# Altium PCB shield_MRF24J40MA.PcbDoc
Units mil, origin at the board's own origin, x right, y up, seen from the top; angles counter-clockwise.
Board outline 1590 x 2520 mil, 2 copper layers (Top Layer, Bottom Layer); 5 components, 20 nets, 46 pads, 0 vias.
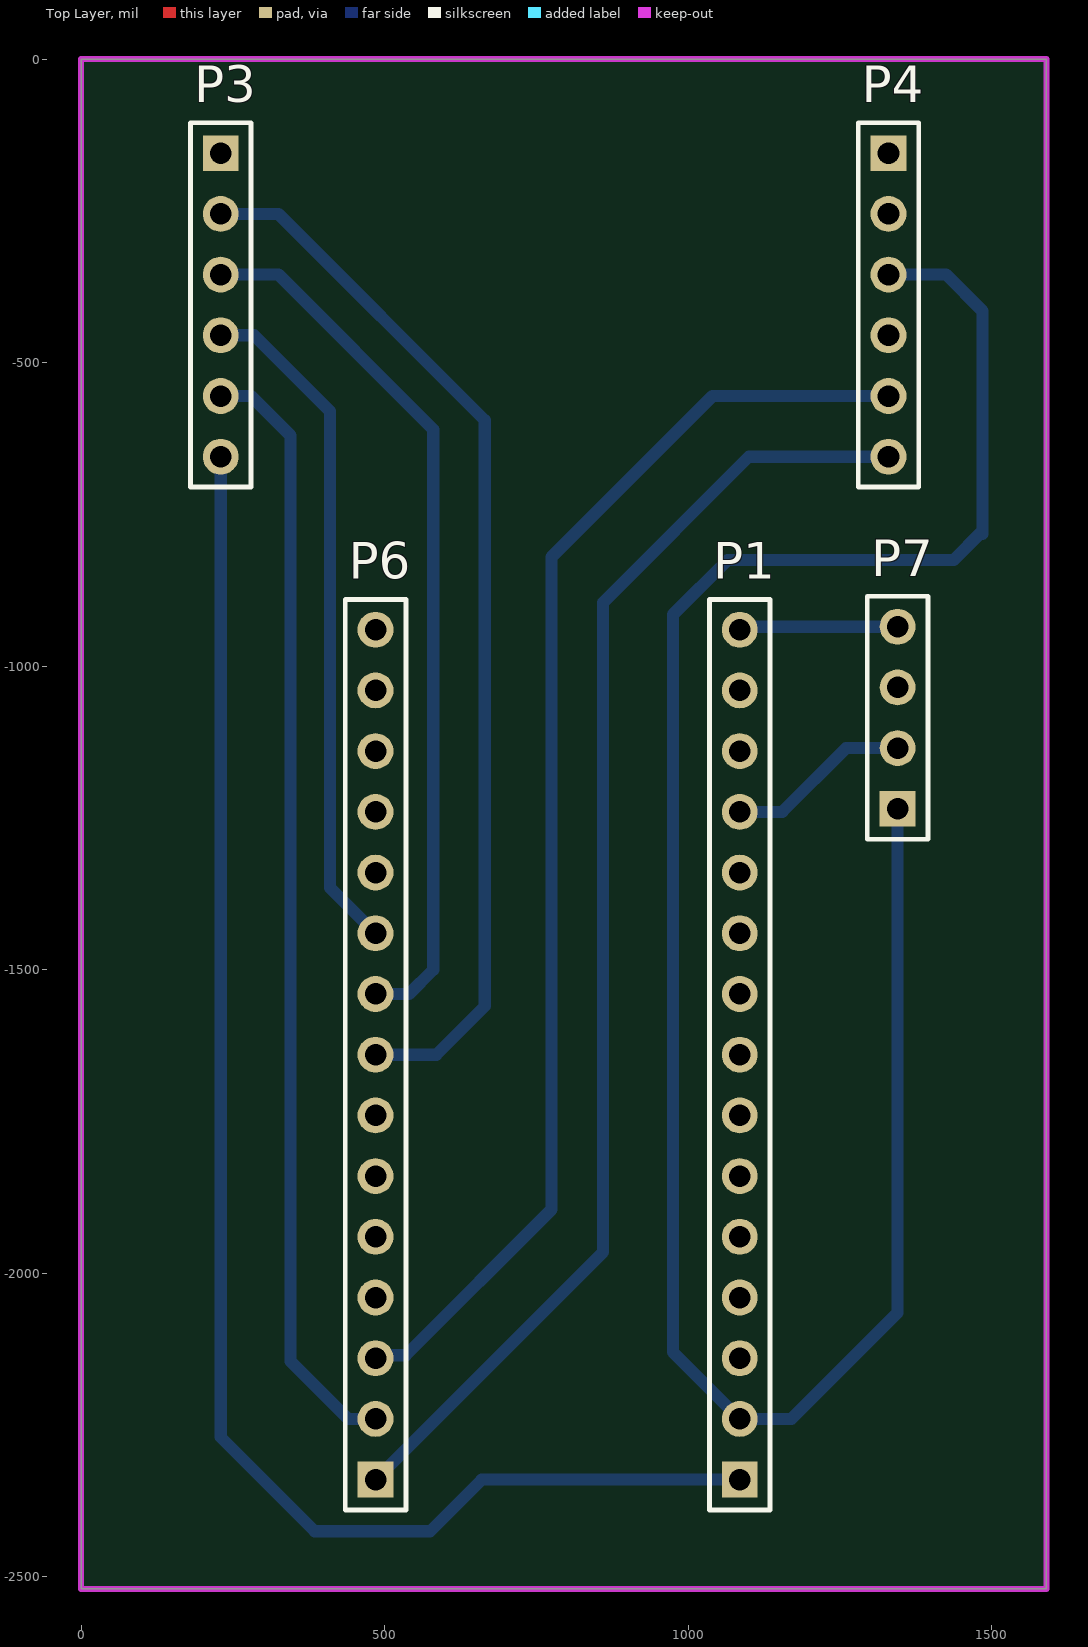
[diagram p0: Top Layer view]
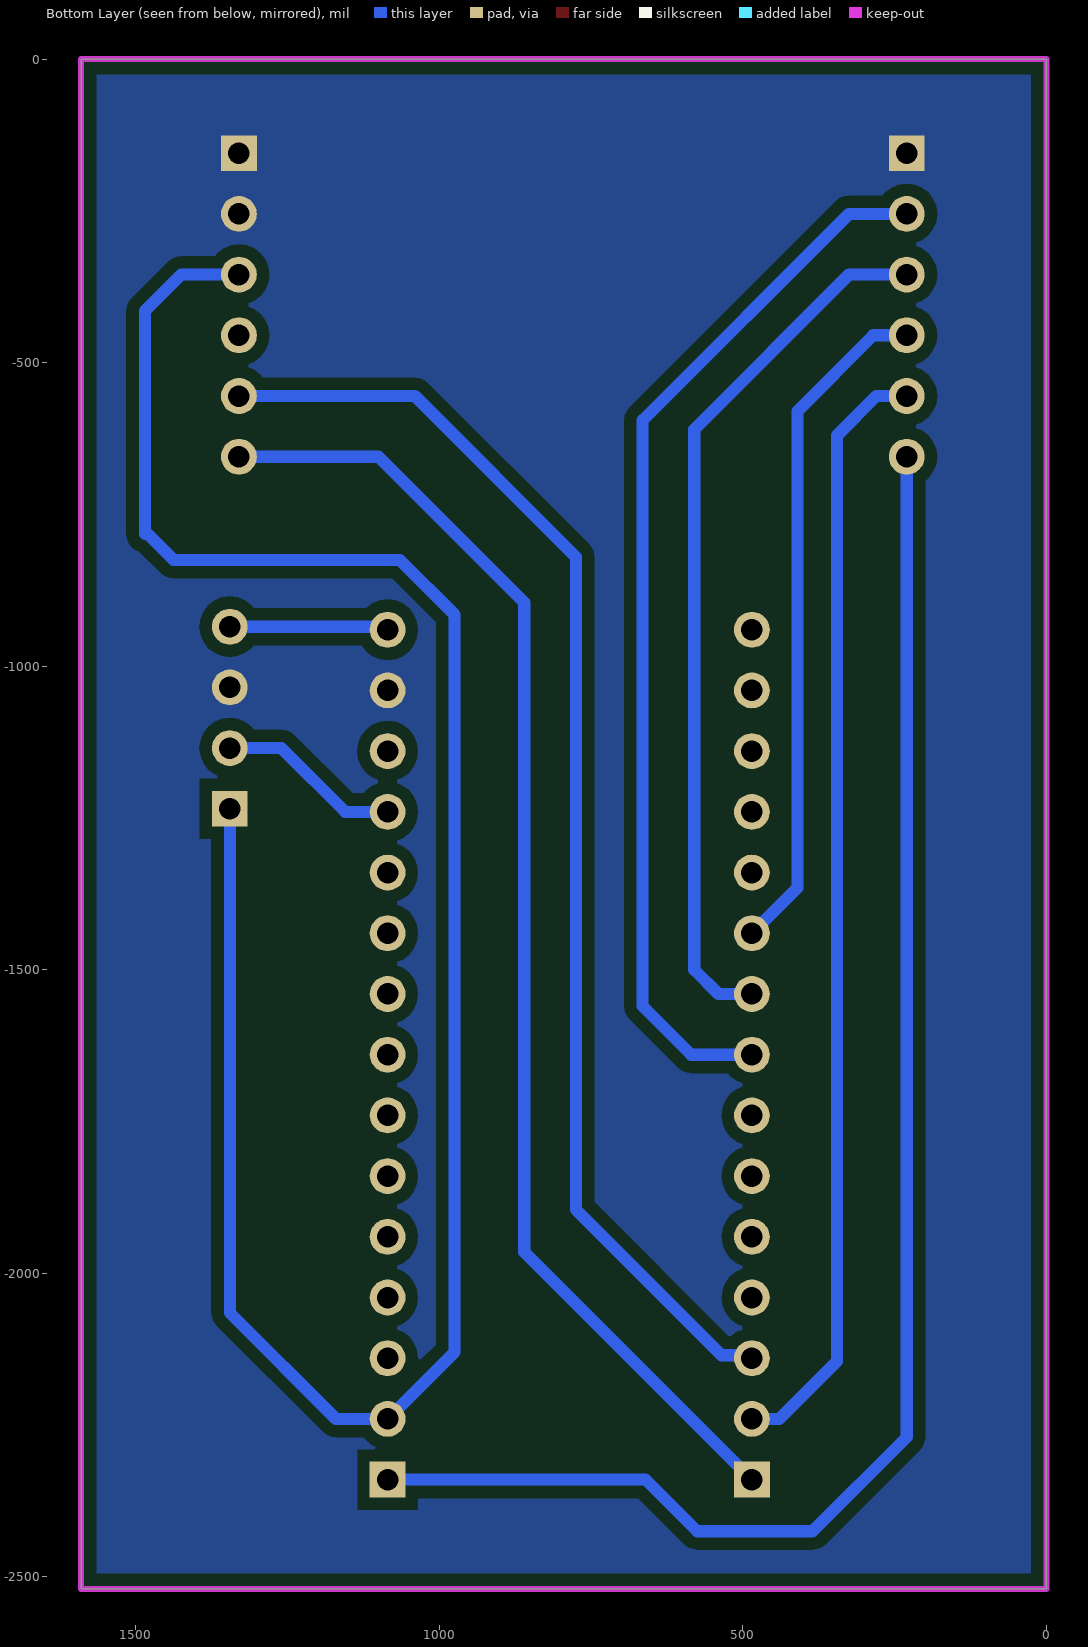
[diagram p1: Bottom Layer view, seen from below]

## Layer stack, top to bottom
Top Solder: solder mask 0.4, Solder Resist, Dk 3.5
Top Layer: signal copper 1.4
Dielectric 1: dielectric 12.6, FR-4, Dk 4.8
Bottom Layer: signal copper 1.4
Bottom Solder: solder mask 0.4, Solder Resist, Dk 3.5

## Board outline
0,0 1590,0 1590,-2520 0,-2520

## Design rules (kind name [scope] priority, off if disabled: settings)
Clearance [All] p1: gap=20 ignorepadtopadclearanceinfootprint=FALSE
PolygonConnect [All] p1: connectstyle=Direct reliefconductorwidth=10 reliefentries=4 polygonreliefangle="90 Angle" airgapwidth=10
RoutingVias [All] p1: holewidth=28 width=50 viastyle="Through Hole" minholewidth=28 minwidth=50 maxholewidth=28 maxwidth=50
SolderMaskExpansion [All] p1: expansion=4 istentingtop=FALSE
Width [All] p1: maxlimit=50 minlimit=10 preferedwidth=20 minimp=50.000000 maximp=50.000000 favimp=50.000000
30 further rules are at their usual default settings.

## Components (designator, comment, footprint, x,y, rotation, side; value= is the part's Value field where it differs from the comment)
P1 "Header 15" HDR1X15 1085,-2340 r90 top
P3 "Header 6" HDR1X6 230,-155 r270 top
P4 "Header 6" HDR1X6 1330,-155 r270 top
P6 "Header 15" HDR1X15 485,-2340 r90 top
P7 "Header 4" HDR1X4 1345,-1235 r90 top

## Footprints (in the part's own frame and the unit in brackets; to place one, negate y for a bottom-side part, rotate by r counter-clockwise, add the part's x,y. Pads: shape width x height; smd on the part's side, far side on the other; paste and mask are expansions set on the pad)
HDR1X4 [mm] "Connector; Header; 4 Position"
  rect 1.5x1.5 hole 0.9: 1(0,0)
  round 1.5 hole 0.9: 2(2.54,0) 3(5.08,0) 4(7.62,0)
  silkscreen extent -1.27,-1.27 8.89,1.27
HDR1X6 [mm] "Connector; Header; 6 Position"
  rect 1.5x1.5 hole 0.9: 1(0,0)
  round 1.5 hole 0.9: 2(2.54,0) 3(5.08,0) 4(7.62,0) 5(10.16,0) 6(12.7,0)
  silkscreen extent -1.27,-1.27 13.97,1.27
HDR1X15 [mm] "Connector; Header; 15 Position"
  rect 1.5x1.5 hole 0.9: 1(0,0)
  round 1.5 hole 0.9: 2(2.54,0) 3(5.08,0) 4(7.62,0) 5(10.16,0) 6(12.7,0) 7(15.24,0) 8(17.78,0) 9(20.32,0) 10(22.86,0) 11(25.4,0) 12(27.94,0) 13(30.48,0) 14(33.02,0) 15(35.56,0)
  silkscreen extent -1.27,-1.27 36.83,1.27

## Part data
P1 P6: "Header, 15-Pin", LatestRevisionDate=17-Jul-2002, LatestRevisionNote="Re-released for DXP Platform.", Publisher="Altium Limited"
P3 P4: "Header, 6-Pin", LatestRevisionDate=17-Jul-2002, LatestRevisionNote="Re-released for DXP Platform.", Publisher="Altium Limited"
P7: "Header, 4-Pin", LatestRevisionDate=17-Jul-2002, LatestRevisionNote="Re-released for DXP Platform.", Publisher="Altium Limited"

## Nets (pads, with @x,y where several pads share a name; then routed paths per layer and width w, separated by ;. In a path a pad name is that pad's centre, name@x,y a point inside that pad or via, vN(x,y) a via of type N, cw(c..) or ccw(c..) an arc to the next point about the centre after c; other vN are vias at no path point)
3.3V: P1.2 P4.3 P7.1 | length 3647.4
  Bottom Layer w20: P4.3 1425,-355 1485,-415 1485,-782.5 1482.5,-780 1437.5,-825 1065,-825 975,-915 975,-2130 P1.2 1170,-2240 1345,-2065 P7.1
3.3V2: 
5V: P1.12 P7.2 | length 303.5
  Bottom Layer w20: P1.12 1155,-1240 1260,-1135 P7.2
CS: P4.5 P6.3 | length 2131.2
  Bottom Layer w20: P6.3 490,-2135 535,-2135 775,-1895 775,-820 1040,-555 P4.5
CS2: 
GND2: P1.14 P3.1 P4.1 P4.2 P7.3
GND3: 
INT: P3.4 P6.10 | length 1122.8
  Bottom Layer w20: P3.4 285,-455 410,-580 410,-1365 P6.10
INT2: 
RESET: P3.2 P6.8 | length 1754
  Bottom Layer w20: P3.2 325,-255 665,-595 665,-1560 585,-1640 P6.8
RESET2: 
SCK: P1.1 P3.6 | length 2569.4
  Bottom Layer w20: P3.6 230,-2270 385,-2425 575,-2425 660,-2340 P1.1
SCK2: 
SDI: P3.5 P6.2 | length 1846.3
  Bottom Layer w20: P3.5 280,-555 345,-620 345,-2145 440,-2240 P6.2
SDI2: 
SDO: P4.6 P6.1 | length 2169.7
  Bottom Layer w20: P6.1 860,-1965 860,-895 1100,-655 P4.6
SDO2: 
VIN: P1.15 P7.4 | length 264.1
  Bottom Layer w20: P1.15 1090,-935 1340,-935 P7.4@1345,-930
WAKE: P3.3 P6.9 | length 1457.2
  Bottom Layer w20: P3.3 325,-355 580,-610 580,-1500 540,-1540 P6.9
WAKE2: 
pads on no net: P1.3 P1.4 P1.5 P1.6 P1.7 P1.8 P1.9 P1.10 P1.11 P1.13 P4.4 P6.4 P6.5 P6.6 P6.7 P6.11 P6.12 P6.13 P6.14 P6.15

## Polygon pours and split planes (outlines as drawn)
GND2 on Bottom Layer "GND2_L02_P000" (solid, remove dead copper, pour order 0): 0,0 1590,0 1590,-2520 0,-2520

## Keep-outs
Keep-Out Layer:
  the board outline again, w10